# Altium PCB Lidar_MCU_PCB_3.PcbDoc
Units mil, origin at the board's own origin, x right, y up, seen from the top; angles counter-clockwise.
Board outline 2362.2 x 1673.23 mil, 4 copper layers (Top Layer 1, GND, 3V3, Bottom Layer 1), stack 22.334 mil thick; 41 components, 52 nets, 244 pads, 51 vias.
Unrouted connection lines stored in the file: 4.
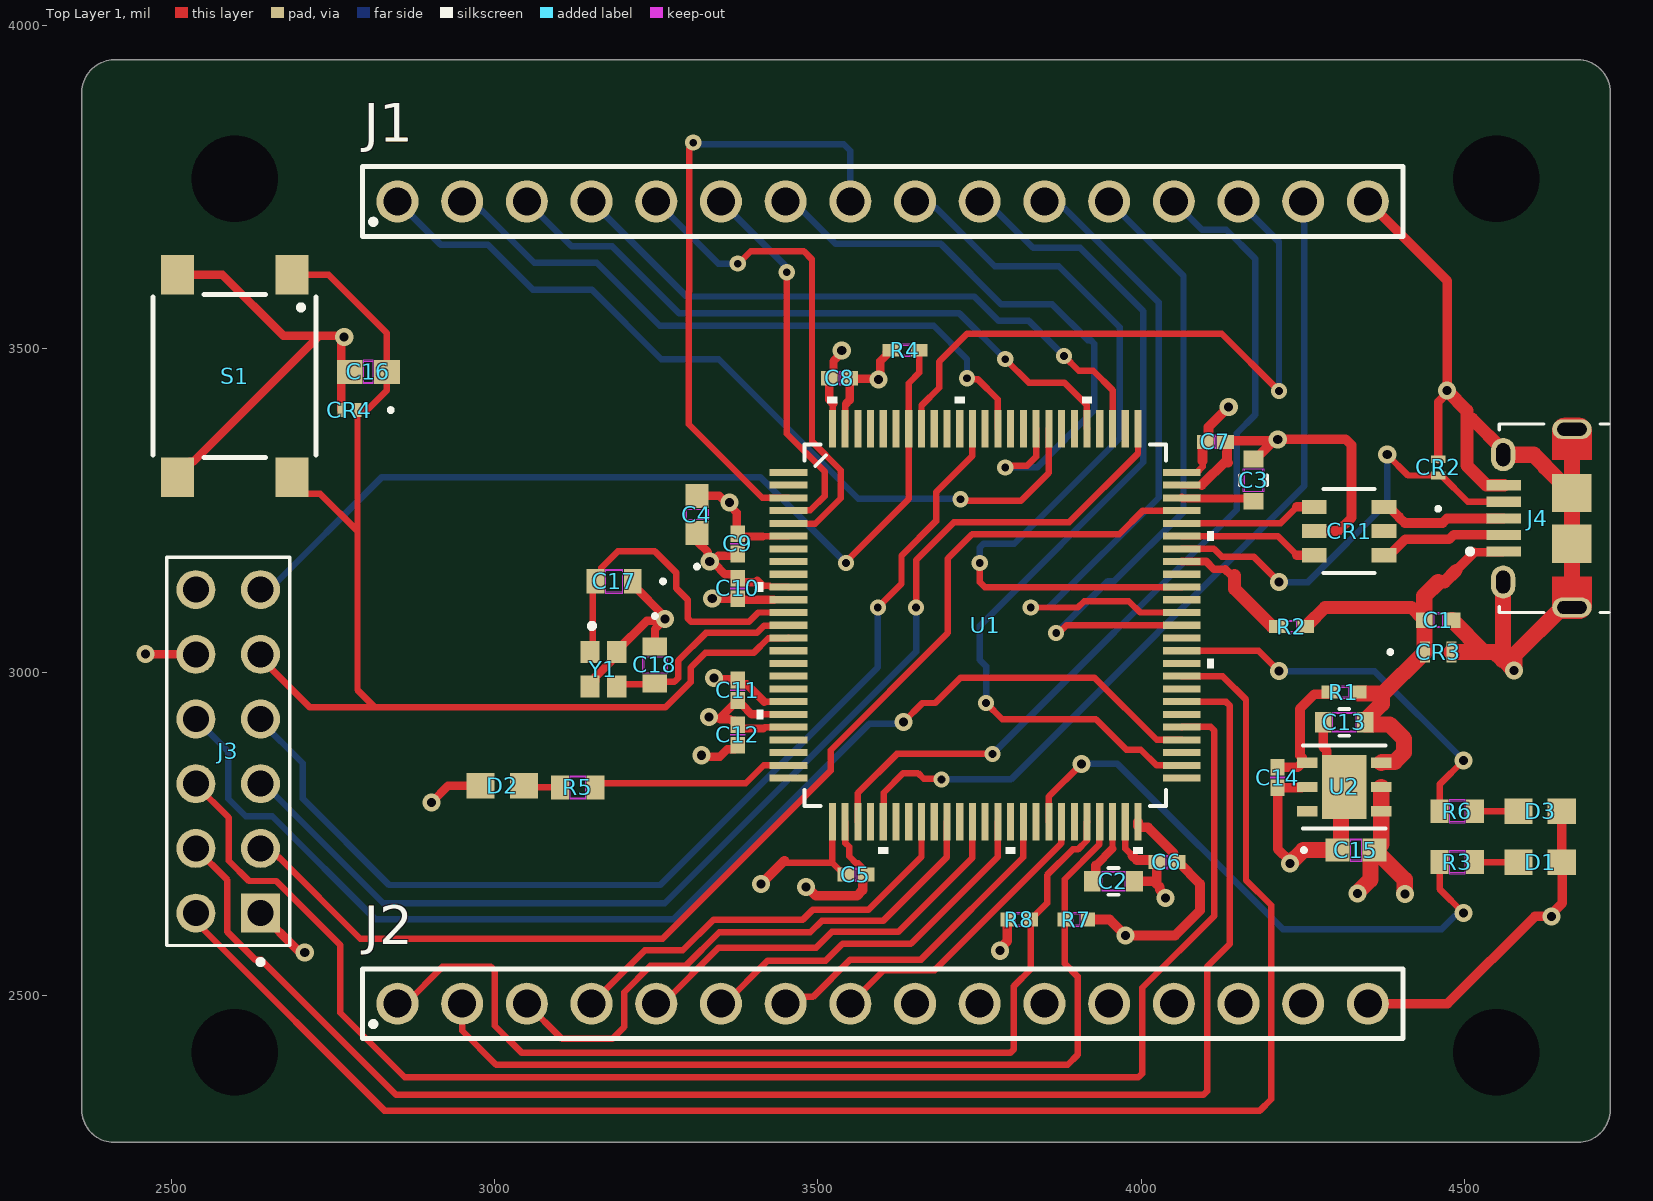
[diagram p0: Top Layer 1 view]
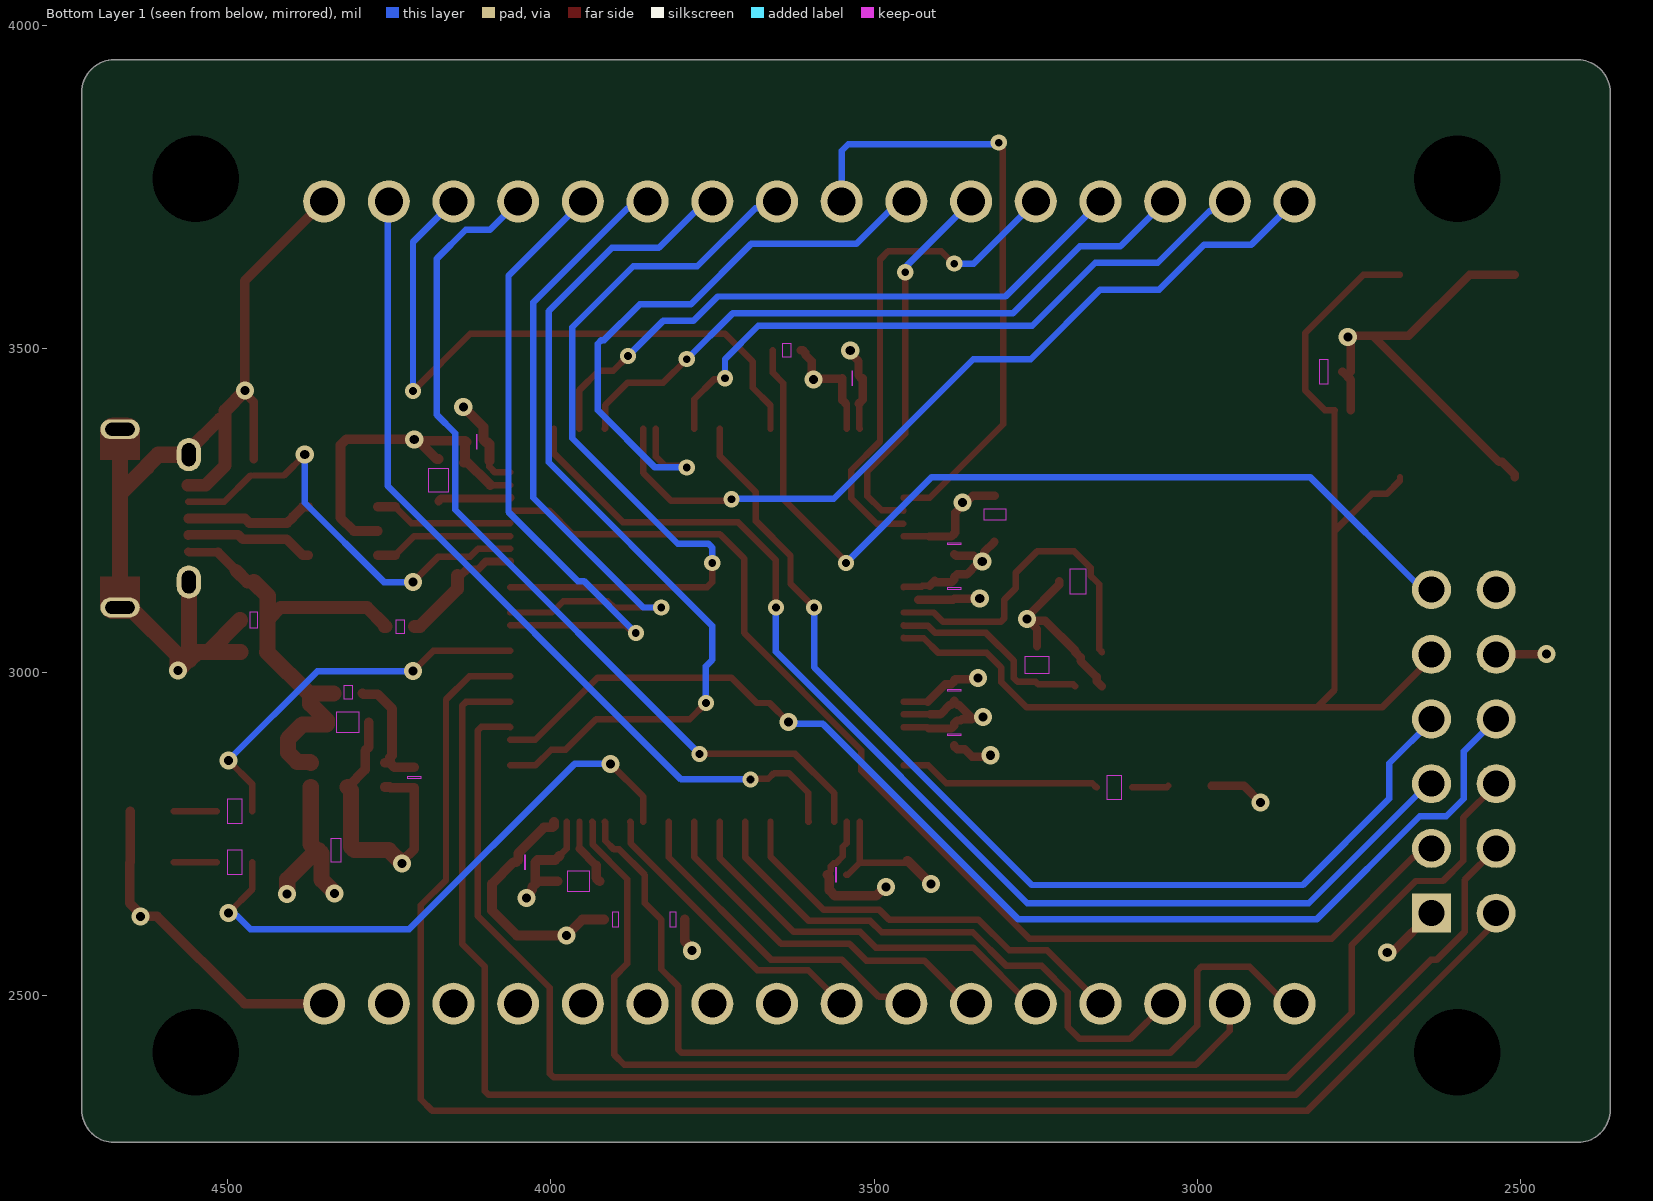
[diagram p1: Bottom Layer 1 view, seen from below]
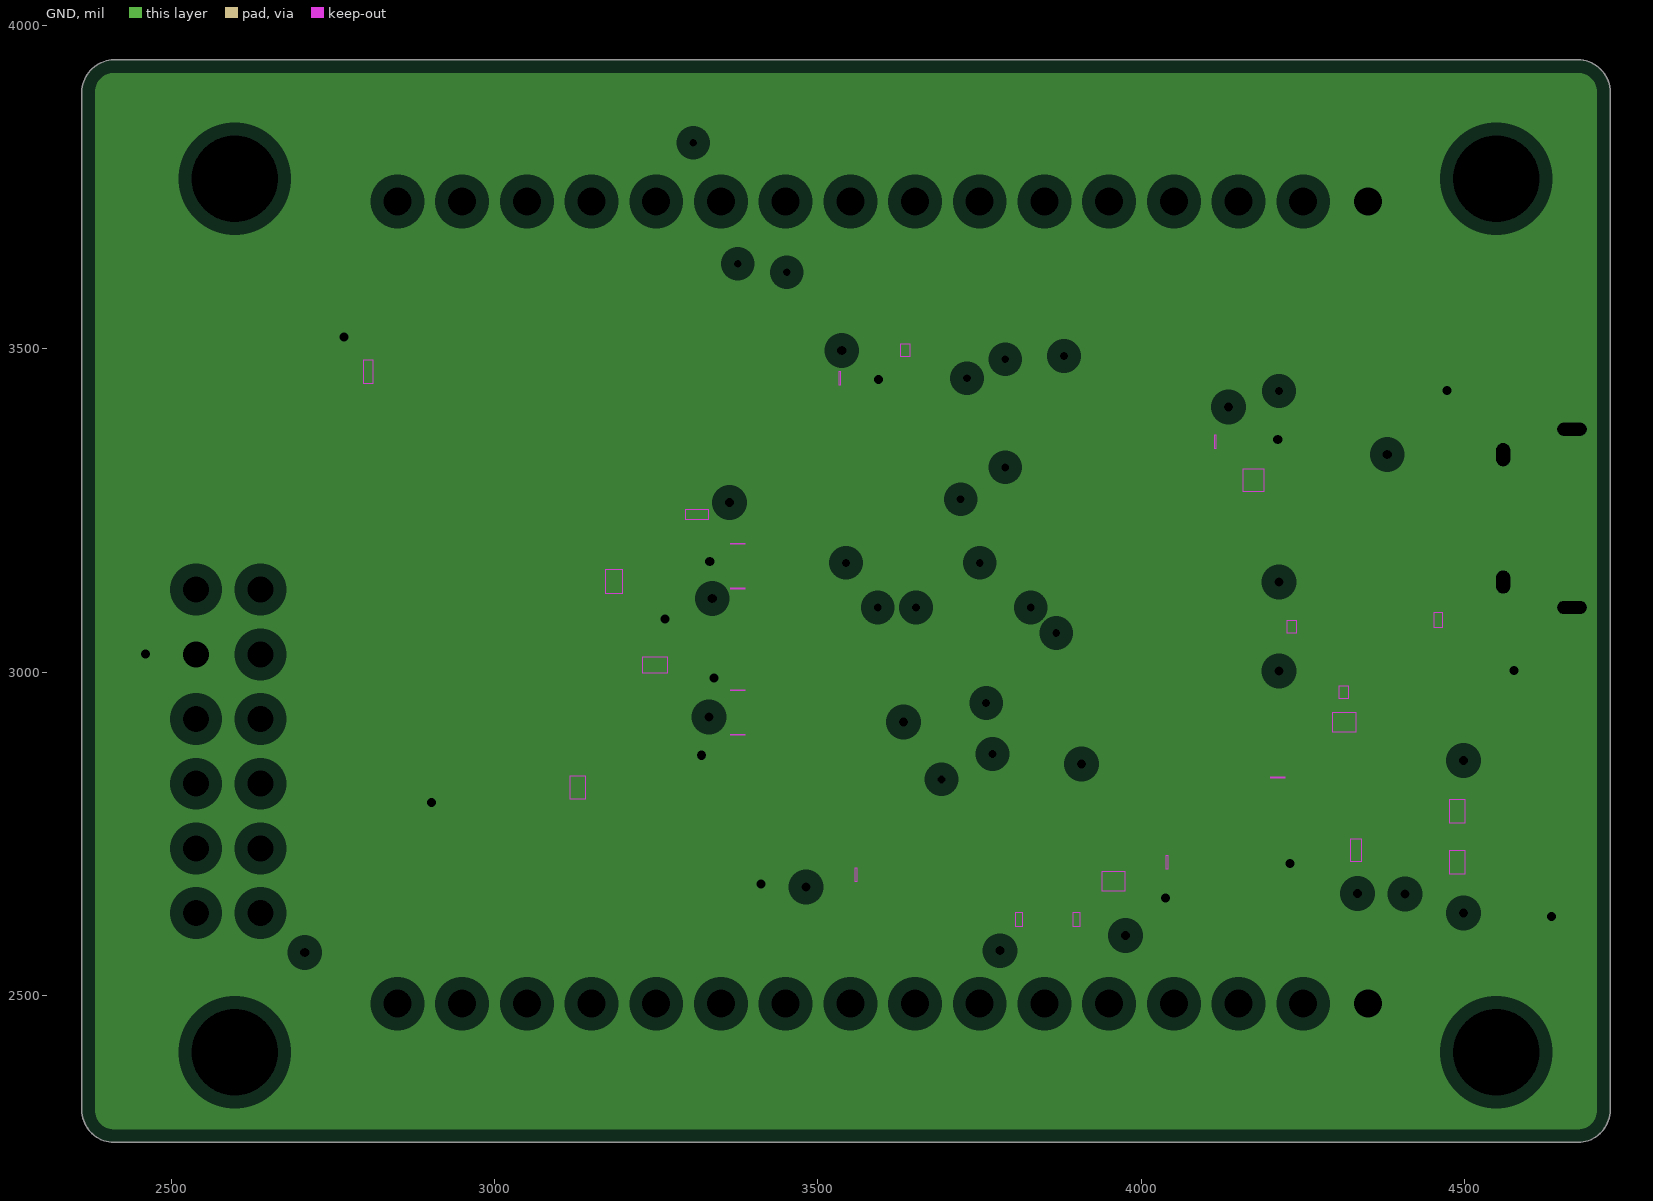
[diagram p2: GND, clearances drawn from the general rule]
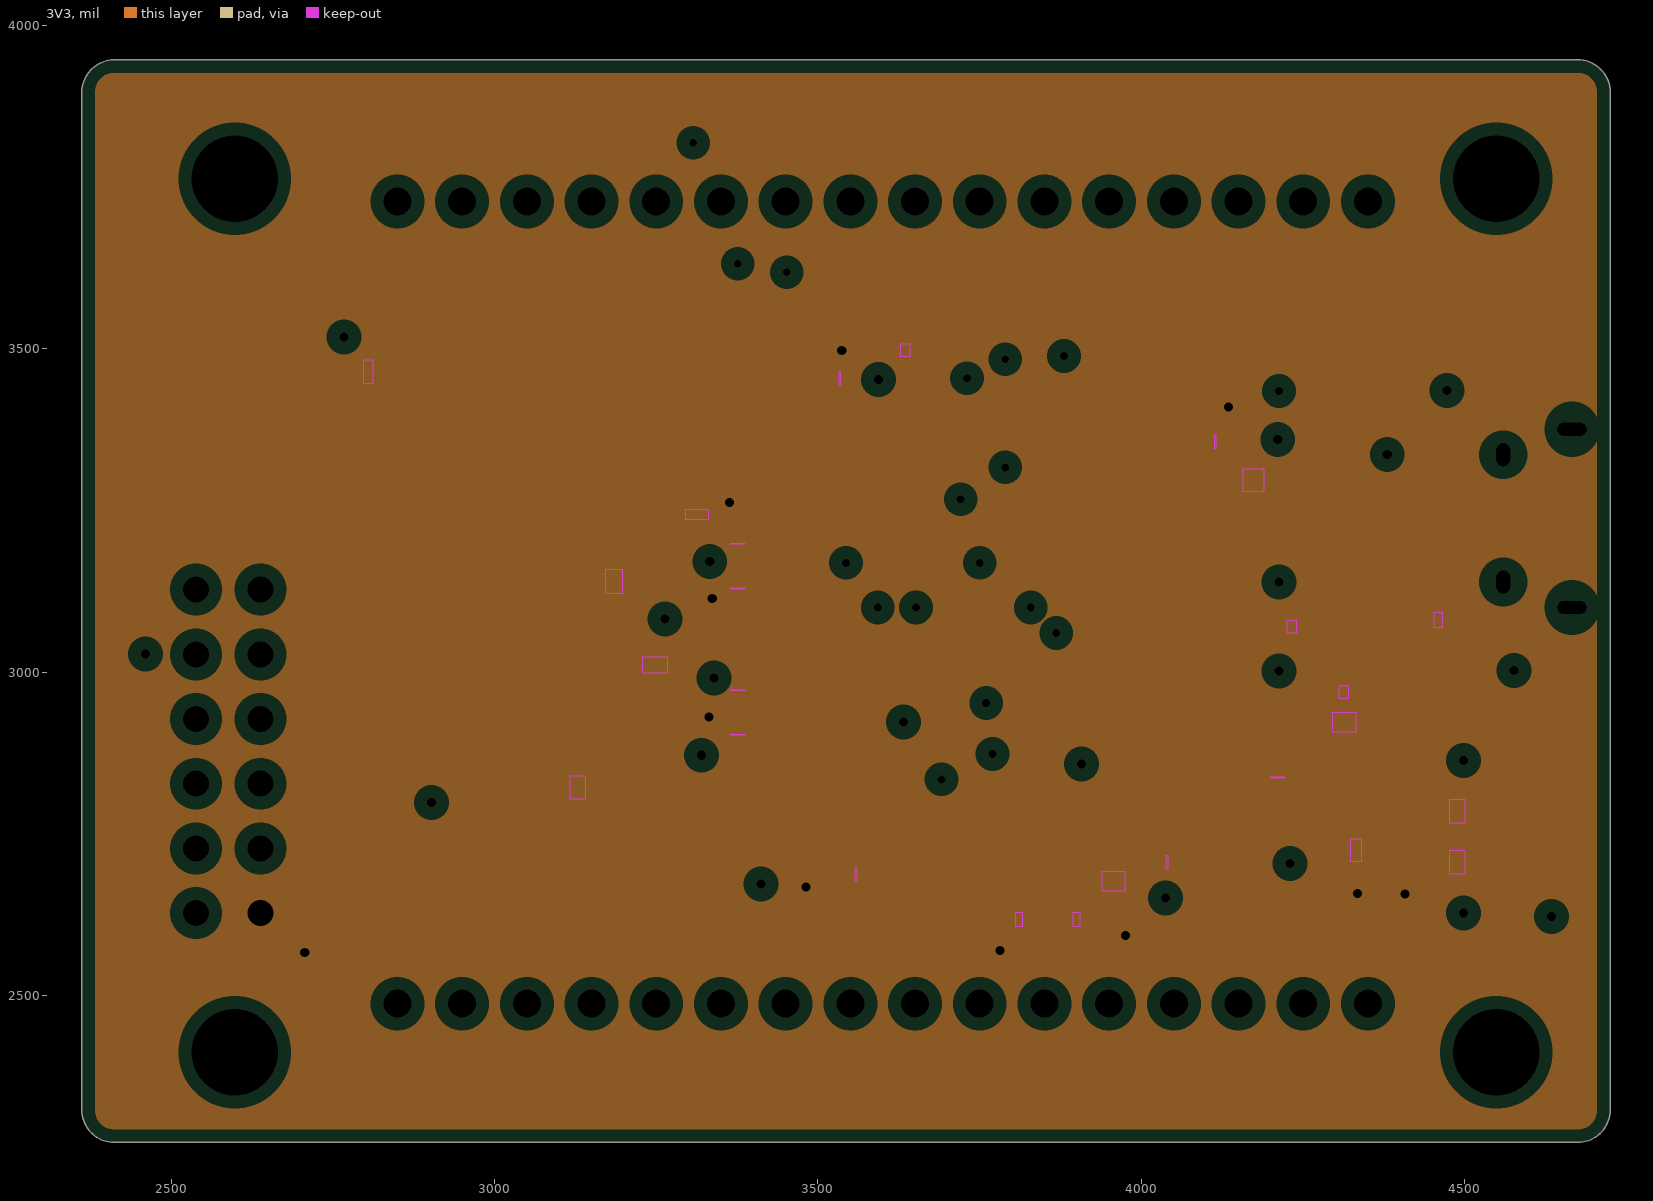
[diagram p3: 3V3, clearances drawn from the general rule]
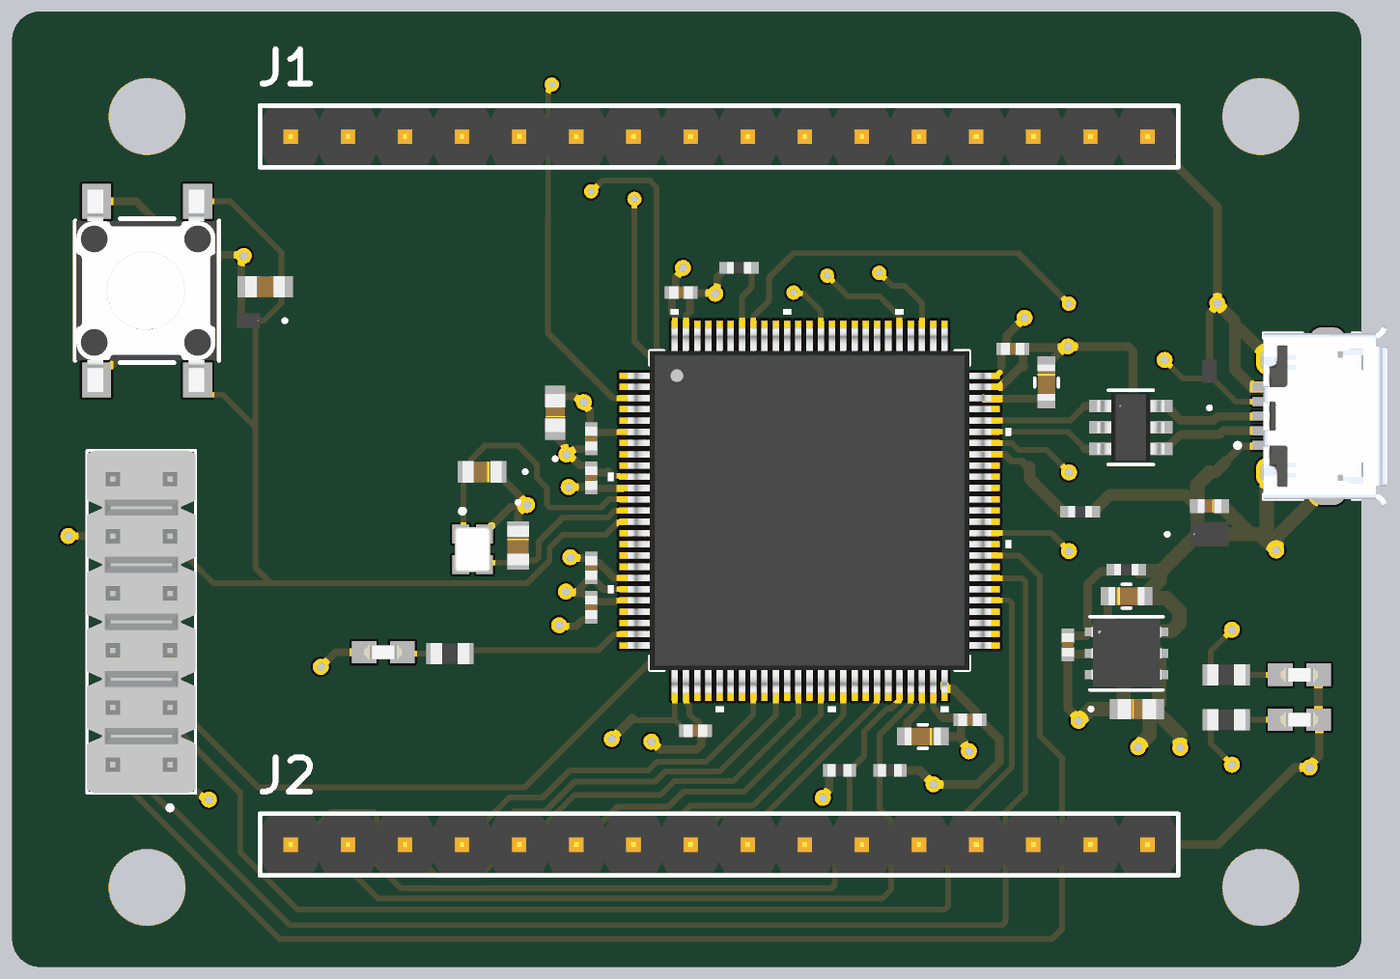
[diagram p4: 3D render of the assembled board from above, using the file's embedded part models]

## Layer stack, top to bottom
Top Solder: solder mask 0.4, Solder Resist, Dk 3.5
Top Layer 1: signal copper 1.378
Dielectric 2: prepreg 2.8, PP-006, Dk 4.1
GND: plane copper 0.689, net GND
Dielectric 1: dielectric 12.6, FR-4, Dk 4.8
3V3: plane copper 0.689, net 3V3
Dielectric 3: prepreg 2.8, PP-006, Dk 4.1
Bottom Layer 1: signal copper 1.378
Bottom Solder: solder mask 0.4, Solder Resist, Dk 3.5

## Board outline
2362.2,2323.62 ccw(c2412.2,2323.62) 2412.2,2273.62 4674.41,2273.62 ccw(c4674.41,2323.62) 4724.41,2323.62 4724.41,3896.85 ccw(c4674.41,3896.85) 4674.41,3946.85 2412.21,3946.85 ccw(c2412.2,3896.85) 2362.2,3896.85

## Design rules (kind name [scope] priority, off if disabled: settings)
Clearance [All] p1: gap=1.5 ignorepadtopadclearanceinfootprint=FALSE except(5.91: Arc-Arc Arc-Track Track-Track; 12: SMDPad-THPad)
DiffPairsRouting [All] p1: maxlimit=15 minlimit=10 mostfreqgap=15 toplayer_minwidth=15 toplayer_maxwidth=15 toplayer_prefwidth=15 bottomlayer_minwidth=15 bottomlayer_maxwidth=15 bottomlayer_prefwidth=15 maxuncoupledlength=500
HoleSize [All] p1: absolutevalues=TRUE maxlimit=150 minlimit=1 maxpercent=80.000 minpercent=20.000
MinimumSolderMaskSliver [All] p1: minsoldermaskwidth=1.5
PlaneClearance [All] p1: clearance=20
PlaneConnect [All] p1: planeconnectstyle=Direct reliefexpansion=20 reliefentries=4 reliefconductorwidth=10 reliefairgap=10
PolygonConnect [All] p1: connectstyle=Relief reliefconductorwidth=10 reliefentries=4 polygonreliefangle="90 Angle" airgapwidth=10
RoutingVias [All] p1: holewidth=14 width=28 viastyle="Through Hole" minholewidth=14 minwidth=25 maxholewidth=28 maxwidth=50
SilkToSolderMaskClearance [IsPad] p1: minsilkscreentomaskgap=7.09 clearancetoexposedcopper=TRUE
SolderMaskExpansion [All] p1: expansion=4 istentingtop=FALSE
SupplyNets "Schematic Supply Nets_2" [InNet('3V3')] p1: voltage=0.000
SupplyNets "Schematic Supply Nets_1" [InNet('GND')] p2: voltage=0.000
SupplyNets "Schematic Supply Nets" [InNet('5V_USB')] p3: voltage=0.000
Width [All] p1: maxlimit=25 minlimit=10 preferedwidth=10
24 further rules are at their usual default settings.

## Classes and differential pairs
net class GPIO_[0..3]: GPIO_0 GPIO_1 GPIO_2 GPIO_3
net class DCMI_[0..11]: DCMI_0 DCMI_1 DCMI_2 DCMI_3 DCMI_4 DCMI_5 DCMI_6 DCMI_7 DCMI_8 DCMI_9 DCMI_10 DCMI_11
component class USB: C1 CR1 CR2 CR3 J4
component class POWER: C13 C14 C15 R1 U2
component class MCU: C2 C3 C4 C5 C6 C7 C8 C9 C10 C11 C12 C16 C17 C18 CR4 D1 D2 D3 R2 R3 R4 R5 R6 R7 R8 S1 U1 Y1
component class Communications: J1 J2 J3
differential pair USB_FS_CN: +USB_FS_CN_P -USB_FS_CN_N
differential pair USB_FS: +USB_FS_P -USB_FS_N

## Components (designator, comment, footprint, x,y, rotation, side; value= is the part's Value field where it differs from the comment)
C1 "CC0402JRNPO9BN101" CAP_CC0402_YAG 4458.66,3080.71 r180 top
C2 "2.2uF" CAP_CL10_SAM 3956.69,2677.17 r180 top
C3 "2.2uF" CAP_CL10_SAM 4173.23,3297.24 r270 top
C4 "4.7uF" LMK107_TAY 3312.99,3244.09 r90 top
C5 "100nF" CAPC10555_55N_KEM 3558.65,2687.4 r0 top
C6 "100nF" CAPC10555_55N_KEM 4039.31,2706.69 r0 top
C7 "100nF" CAPC10555_55N_KEM 4114.17,3356.3 r180 top
C8 "100nF" CAPC10555_55N_KEM 3533.46,3454.72 r180 top
C9 "100nF" CAPC10555_55N_KEM 3375.98,3198.82 r90 top
C10 "100nF" CAPC10555_55N_KEM 3375.98,3129.92 r270 top
C11 "100nF" CAPC10555_55N_KEM 3375.98,2972.44 r270 top
C12 "100nF" CAPC10555_55N_KEM 3375.98,2903.54 r90 top
C13 "4.7uF" CAP_CL10_SAM 4313.43,2922.99 r0 top
C14 "100nF" CAPC10555_55N_KEM 4210.63,2837.6 r90 top
C15 "4.7uF" LMK107_TAY 4331.58,2725.39 r0 top
C16 "100nF" CAPC17595_90N_KEM 2805.12,3464.57 r0 top
C17 "6pF" CAP_06033D104JAT2A 3185.04,3140.75 r180 top
C18 "6pF" CAP_06033D104JAT2A 3248.03,3011.81 r270 top
CR1 "USBLC6-2SC6" SOT23-6L_STM 4320.87,3218.5 r0 top
CR2 "ESDALC6V1-1M2" SOD882_STM 4458.66,3316.93 r90 top
CR3 "ESDA7P60-1U1M" ZDO_1610_STM 4458.66,3031.5 r0 top
CR4 "ESDALC6V1-1M2" SOD882_STM 2775.59,3405.51 r180 top
D1 "LTST-S270KRKT" 0603 4616.14,2706.69 r180 top
D2 "LTST-S270KRKT" 0603 3011.81,2824.8 r0 top
D3 "LTST-S270KRKT" 0603 4616.14,2785.43 r180 top
J1 "6130XX11121_61301611121" 61301611121 3600,3727.99 r0 top
J2 "6130XX11121_61301611121" 61301611121 3600,2487.99 r0 top
J3 "10129381-912001BLF" AMPHENOL_10129381-912001BLF 2588.43,2877.99 r90 top
J4 "10118194-0001LF" AMPHENOL_10118194-0001LF 4665.35,3238.19 r90 top
R1 "10k" RC0402N_YAG 4312.99,2969.49 r0 top
R2 "10k" RC0402N_YAG 4232.28,3070.87 r180 top
R3 "330" STA_RMCF0603_STP 4488.19,2706.69 r180 top
R4 "10k" RC0402N_YAG 3634.84,3498.03 r0 top
R5 "330" STA_RMCF0603_STP 3128.58,2822.2 r0 top
R6 "330" STA_RMCF0603_STP 4488.19,2785.43 r180 top
R7 "4.7k" YAG_R0402_YAG 3899.32,2618.11 r180 top
R8 "4.7k" YAG_R0402_YAG 3810.74,2618.11 r0 top
S1 "430182043816" 430182043816 2598.43,3457.99 r270 top
U1 "STM32H7A3VIT6" LQFP100 3758.43,3072.99 r0 top
U2 "ST1L05CPU33R" DFN6_3X3_STM 4313.43,2822.99 r0 top
Y1 "ECS-250-6-37-JTN-TR" XTAL_ECS-250-6-37-JTN-TR 3168.31,3004.92 r270 top

## Footprints (in the part's own frame and the unit in brackets; to place one, negate y for a bottom-side part, rotate by r counter-clockwise, add the part's x,y. Pads: shape width x height; smd on the part's side, far side on the other; paste and mask are expansions set on the pad)
0603 [mm]
  rect 1.1x1 smd: 1(-0.85,0) 2(0.85,0)
  body extent -0.82,-0.3 0.82,0.3, height 1.15
61301611121 [mm]
  round 1.65 hole 1.1: 1(-19.05,0) 2(-16.51,0) 3(-13.97,0) 4(-11.43,0) 5(-8.89,0) 6(-6.35,0) 7(-3.81,0) 8(-1.27,0) 9(1.27,0) 10(3.81,0) 11(6.35,0) 12(8.89,0) 13(11.43,0) 14(13.97,0) 15(16.51,0) 16(19.05,0)
  silkscreen extent -20.42,-1.37 20.42,1.37, body extent -20.32,-1.27 20.32,1.27, height 8.69
430182043816 [mm]
  rect 1.55x1.3 smd: 1(-3.975,2.25) 2(-3.975,-2.25) 3(3.975,2.25) 4(3.975,-2.25)
  silkscreen extent -3.2,-3.2 3.2,3.2, body extent -4.5,-3.15 4.5,3.05, height 4.3
AMPHENOL_10118194-0001LF [mm]
  rect 0.4x1.35 smd: 1(-1.3,2.675) 2(-0.65,2.675) 3(0,2.675) 4(0.65,2.675) 5(1.3,2.675)
  oval 0.775x1.55 hole 0.5 slot 1.15 at 90 deg mask+0: SH1(-3.5,0) SH4(3.5,0)
  rect 1.5x1.55 smd: SH2(1,0) SH3(-1,0)
  oval 1.3x0.95 hole 0.55 slot 0.9 at 0 deg: SH5(-2.5,2.7) SH6(2.5,2.7)
  Top Layer 1 region: 3.471,0.774 3.497,0.772 3.523,0.769 3.549,0.764 3.574,0.758 3.6,0.751 3.624,0.742 3.648,0.732 3.672,0.721 3.695,0.708 3.717,0.694 3.739,0.68 3.76,0.664 3.78,0.647 3.799,0.629 3.817,0.61 3.834,0.59 3.85,0.569 3.864,0.547 3.878,0.525 3.891,0.502 3.902,0.478 3.912,0.454 3.921,0.43 3.928,0.404 3.934,0.379 3.939,0.353 3.942,0.327 3.944,0.301 3.945,0.275 3.945,-0.275 3.944,-0.301 3.942,-0.327 3.939,-0.353 3.934,-0.379 3.928,-0.404 3.921,-0.43 3.912,-0.454 3.902,-0.478 3.891,-0.502 3.878,-0.525 3.864,-0.547 3.85,-0.569 3.834,-0.59 3.817,-0.61 3.799,-0.629 3.78,-0.647 3.76,-0.664 3.739,-0.68 3.717,-0.694 3.695,-0.708 3.672,-0.721 3.648,-0.732 3.624,-0.742 3.6,-0.751 3.574,-0.758 3.549,-0.764 3.523,-0.769 3.497,-0.772 3.471,-0.774 3.445,-0.775 2.3,-0.775 2.3,0.775 3.445,0.775
  Top Layer 1 region: -2.3,-0.775 -3.445,-0.775 -3.471,-0.774 -3.497,-0.772 -3.523,-0.769 -3.549,-0.764 -3.574,-0.758 -3.6,-0.751 -3.624,-0.742 -3.648,-0.732 -3.672,-0.721 -3.695,-0.708 -3.717,-0.694 -3.739,-0.68 -3.76,-0.664 -3.78,-0.647 -3.799,-0.629 -3.817,-0.61 -3.834,-0.59 -3.85,-0.569 -3.864,-0.547 -3.878,-0.525 -3.891,-0.502 -3.902,-0.478 -3.912,-0.454 -3.921,-0.43 -3.928,-0.404 -3.934,-0.379 -3.939,-0.353 -3.942,-0.327 -3.944,-0.301 -3.945,-0.275 -3.945,0.275 -3.944,0.301 -3.942,0.327 -3.939,0.353 -3.934,0.379 -3.928,0.404 -3.921,0.43 -3.912,0.454 -3.902,0.478 -3.891,0.502 -3.878,0.525 -3.864,0.547 -3.85,0.569 -3.834,0.59 -3.817,0.61 -3.799,0.629 -3.78,0.647 -3.76,0.664 -3.739,0.68 -3.717,0.694 -3.695,0.708 -3.672,0.721 -3.648,0.732 -3.624,0.742 -3.6,0.751 -3.574,0.758 -3.549,0.764 -3.523,0.769 -3.497,0.772 -3.471,0.774 -3.445,0.775 -2.3,0.775
  silkscreen extent -3.7,-1.45 3.7,4.1, body extent -4.02,-2.68 4.02,2.85, height 2.67
AMPHENOL_10129381-912001BLF [mm]
  rect 1.53x1.53 / inner round 1.53 / far side rect 1.53x1.53 hole 1.02: 01(-6.35,-1.27)
  round 1.53 hole 1.02: 02(-6.35,1.27) 03(-3.81,-1.27) 04(-3.81,1.27) 05(-1.27,-1.27) 06(-1.27,1.27) 07(1.27,-1.27) 08(1.27,1.27) 09(3.81,-1.27) 10(3.81,1.27) 11(6.35,-1.27) 12(6.35,1.27)
  silkscreen extent -8.37,-2.42 7.62,2.41, body extent -7.62,-2.42 7.62,2.41, height 8.69
CAP_06033D104JAT2A [mm]
  rect 0.703x0.96 smd paste+0 mask+0: 1(-0.727,0) 2(0.727,0)
  Top Layer 1 keep-out region: -0.324,-0.429 -0.324,0.429 0.324,0.429 0.324,-0.429
  Keep-Out Layer region: -0.324,-0.48 -0.324,0.48 0.324,0.48 0.324,-0.48
  silkscreen extent -1.99,-0.08 -1.84,0.08, body extent -0.87,-0.48 0.87,0.48, height 0.9
CAP_CC0402_YAG [mil]
  rect 26x24 smd paste+0 mask+0: 1(-21.5,0) 2(21.5,0)
  Top Layer 1 keep-out region: -6.5,-10 -6.5,10 6.5,10 6.5,-10
  Keep-Out Layer region: -6.5,-12 -6.5,12 6.5,12 6.5,-12
  body extent -21,-12 21,12, height 22
CAP_CL10_SAM [mm]
  rect 0.656x0.8 smd paste+0 mask+0: 1(-0.828,0) 2(0.828,0)
  Top Layer 1 keep-out region: -0.449,-0.349 -0.449,0.349 0.449,0.349 0.449,-0.349
  Keep-Out Layer region: -0.449,-0.4 -0.449,0.4 0.449,0.4 0.449,-0.4
  silkscreen extent -0.19,-0.53 0.19,0.53, body extent -0.8,-0.4 0.8,0.4, height 0.9
CAPC10555_55N_KEM [mm]
  rect 0.653x0.55 smd paste+0 mask+0: 1(-0.402,0) 2(0.402,0)
  Top Layer 1 keep-out region: -0.024,-0.224 -0.024,0.224 0.024,0.224 0.024,-0.224
  Keep-Out Layer region: -0.024,-0.275 -0.024,0.275 0.024,0.275 0.024,-0.275
  body extent -0.53,-0.28 0.53,0.28, height 0.55
CAPC17595_90N_KEM [mm]
  rect 1.006x0.95 smd paste+0 mask+0: 1(-0.728,0) 2(0.728,0)
  Top Layer 1 keep-out region: -0.174,-0.424 -0.174,0.424 0.174,0.424 0.174,-0.424
  Keep-Out Layer region: -0.174,-0.475 -0.174,0.475 0.174,0.475 0.174,-0.475
  body extent -0.87,-0.48 0.87,0.48, height 0.9
DFN6_3X3_STM [mm]
  rect 0.8x0.4 smd paste+0 mask+0: 1(-1.45,0.95) 2(-1.45,0) 3(-1.45,-0.95) 4(1.45,-0.95) 5(1.45,0) 6(1.45,0.95)
  rect 1.75x2.5 smd paste+0 mask+0: 7(0,0)
  silkscreen extent -1.63,-1.63 1.63,1.63, body extent -1.55,-1.5 1.55,1.5, height 0.8
LMK107_TAY [mm]
  rect 0.956x0.9 smd paste+0 mask+0: 1(-0.728,0) 2(0.728,0)
  Top Layer 1 keep-out region: -0.199,-0.399 -0.199,0.399 0.199,0.399 0.199,-0.399
  Keep-Out Layer region: -0.199,-0.45 -0.199,0.45 0.199,0.45 0.199,-0.45
  silkscreen extent -2.12,-0.08 -1.97,0.08, body extent -0.85,-0.45 0.85,0.45, height 0.9
LQFP100 [mil]
  rect 58x11 smd paste-29 mask+5: 1(-304,236.22) 2(-304,216.54) 3(-304,196.85) 4(-304,177.17) 5(-304,157.48) 6(-304,137.8) 7(-304,118.11) 8(-304,98.43) 9(-304,78.74) 10(-304,59.06) 11(-304,39.37) 12(-304,19.69) 13(-304,0) 14(-304,-19.68) 15(-304,-39.37) 16(-304,-59.06) 17(-304,-78.74) 18(-304,-98.43) 19(-304,-118.11) 20(-304,-137.8) 21(-304,-157.48) 22(-304,-177.17) 23(-304,-196.85) 24(-304,-216.54) 25(-304,-236.22) 51(304,-236.22) 52(304,-216.54) 53(304,-196.85) 54(304,-177.17) 55(304,-157.48) 56(304,-137.8) 57(304,-118.11) 58(304,-98.43) 59(304,-78.74) 60(304,-59.06) 61(304,-39.37) 62(304,-19.68) 63(304,0) 64(304,19.69) 65(304,39.37) 66(304,59.06) 67(304,78.74) 68(304,98.43) 69(304,118.11) 70(304,137.8) 71(304,157.48) 72(304,177.17) 73(304,196.85) 74(304,216.54) 75(304,236.22)
  rect 11x58 smd paste-29 mask+5: 26(-236.22,-304) 27(-216.54,-304) 28(-196.85,-304) 29(-177.17,-304) 30(-157.48,-304) 31(-137.8,-304) 32(-118.11,-304) 33(-98.43,-304) 34(-78.74,-304) 35(-59.06,-304) 36(-39.37,-304) 37(-19.68,-304) 38(0,-304) 39(19.69,-304) 40(39.37,-304) 41(59.06,-304) 42(78.74,-304) 43(98.43,-304) 44(118.11,-304) 45(137.8,-304) 46(157.48,-304) 47(177.17,-304) 48(196.85,-304) 49(216.54,-304) 50(236.22,-304) 76(236.22,304) 77(216.54,304) 78(196.85,304) 79(177.17,304) 80(157.48,304) 81(137.8,304) 82(118.11,304) 83(98.43,304) 84(78.74,304) 85(59.06,304) 86(39.37,304) 87(19.69,304) 88(0,304) 89(-19.68,304) 90(-39.37,304) 91(-59.06,304) 92(-78.74,304) 93(-98.43,304) 94(-118.11,304) 95(-137.8,304) 96(-157.48,304) 97(-177.17,304) 98(-196.85,304) 99(-216.54,304) 100(-236.22,304)
  silkscreen extent -353,-353 353,353, body extent -319,-319 319,319, height 63
RC0402N_YAG [mil]
  rect 25.78x20 smd paste+0 mask+0: 1(-21.89,0) 2(21.89,0)
  Top Layer 1 keep-out region: -7,-8 -7,8 7,8 7,-8
  Keep-Out Layer region: -7,-10 -7,10 7,10 7,-10
  body extent -21,-10 21,10, height 28
SOD882_STM [mil]
  rect 12x22 smd paste+0 mask-1: 1(-12.5,0) 2(12.5,0)
  silkscreen extent -67,-3 -61,3, body extent -21,-13 21,13, height 20
SOT23-6L_STM [mil]
  rect 38.5x22 smd paste+0 mask+0: 1(-53.75,37.4) 2(-53.75,0) 3(-53.75,-37.4) 4(53.75,-37.4) 5(53.75,0) 6(53.75,37.4)
  silkscreen extent -39,-65 40,65, body extent -59,-60 59,60, height 57
STA_RMCF0603_STP [mil]
  rect 28x37 smd paste+0 mask+0: 1(-27.5,0) 2(27.5,0)
  Top Layer 1 keep-out region: -11.5,-16.5 -11.5,16.5 11.5,16.5 11.5,-16.5
  Keep-Out Layer region: -11.5,-18.5 -11.5,18.5 11.5,18.5 11.5,-18.5
  body extent -34,-19 34,19, height 22
XTAL_ECS-250-6-37-JTN-TR [mm]
  rect 0.85x0.75 smd: 1(-0.675,-0.525) 2(0.675,-0.525) 3(0.675,0.525) 4(-0.675,0.525)
  silkscreen extent -1.8,-0.55 -1.6,-0.35, body extent -1,-0.8 1,0.8, height 0.55
YAG_R0402_YAG [mil]
  rect 22x22 smd paste+0 mask+0: 1(-18,0) 2(18,0)
  Top Layer 1 keep-out region: -5,-9 -5,9 5,9 5,-9
  Keep-Out Layer region: -5,-11 -5,11 5,11 5,-11
  body extent -21,-11 21,11, height 16
ZDO_1610_STM [mil]
  rect 16x33 smd paste+0 mask+0: 1(-20.5,0) 2(20.5,0)
  silkscreen extent -77,-3 -71,3, body extent -34,-21 34,21, height 24

## Part data
C1: "CAPACITOR; SMT (0402); CERAMIC CHIP; 100PF; 50V; TOL=5%; TG=-55 DEGC TO +125 DEGC; TC=C0G", Manufacturer_Name=Yageo, Copyright="Copyright (C) 2025 Ultra Librarian. All rights reserved.", Manufacturer_Part_Number=CC0402JRNPO9BN101
C2 C3: library part CL10B225KP8NNNC, "CL10B225KP8NNNC", Manufacturer_Name=Samsung, Copyright="Copyright (C) 2025 Ultra Librarian. All rights reserved.", Manufacturer_Part_Number=CL10B225KP8NNNC
C4: library part LMK107BJ475MAHT, "LMK107BJ475MAHT", Manufacturer_Name="TAIYO YUDEN", Copyright="Copyright (C) 2025 Ultra Librarian. All rights reserved.", Manufacturer_Part_Number=LMK107BJ475MAHT
C5 C6 C7 C8 C9 C10 C11 C12 C14: library part C0402C104K4RACTU, "SMD Comm X7R, Ceramic, 0.1 uF, 10%, 16 VDC, X7R, SMD, MLCC, Temperature Stable, Class II, 0402", Manufacturer_Name=Kemet, Copyright="Copyright (C) 2025 Ultra Librarian. All rights reserved.", Manufacturer_Part_Number=C0402C104K4RACTU
C13: library part CL10A475MO8NNNC, "No Description Available", Manufacturer_Name=Samsung, Copyright="Copyright (C) 2025 Ultra Librarian. All rights reserved.", Manufacturer_Part_Number=CL10A475MO8NNNC
C15: library part LMK107BJ475MAHT, "No Description Available", Manufacturer_Name="TAIYO YUDEN", Copyright="Copyright (C) 2025 Ultra Librarian. All rights reserved.", Manufacturer_Part_Number=LMK107BJ475MAHT
C16: library part C0603C104K9PACTU, "SMD Comm X5R, Ceramic, 0.1 uF, 10%, 6.3 VDC, X5R, SMD, MLCC, Temperature Stable, Class II, 0603", Manufacturer_Name=Kemet, Copyright="Copyright (C) 2025 Ultra Librarian. All rights reserved.", Manufacturer_Part_Number=C0603C104K9PACTU
C17 C18: library part 06035A6R0JAT2A, "No Description Available", Manufacturer_Name="KYOCERA AVX", Copyright="Copyright (C) 2025 Ultra Librarian. All rights reserved.", Manufacturer_Part_Number=06035A6R0JAT2A
CR1: "ESD Protection for USB 2.0 High Speed", Manufacturer_Name=STMicroelectronics, Copyright="Copyright (C) 2025 Ultra Librarian. All rights reserved.", Manufacturer_Part_Number=USBLC6-2SC6, RefDes=RefDes, Type=Type
CR2 CR4: "Single line low capacitance Transil&#8482;, transient surge voltage suppressor (TVS) for ESD protection", Manufacturer_Name=STMicroelectronics, Copyright="Copyright (C) 2025 Ultra Librarian. All rights reserved.", Manufacturer_Part_Number=ESDALC6V1-1M2, RefDes=RefDes, Type=Type
CR3: "60 A - 8/20 us, 5 V TVS in QFN-2L", Manufacturer_Name=STMicroelectronics, Copyright="Copyright (C) 2025 Ultra Librarian. All rights reserved.", Manufacturer_Part_Number=ESDA7P60-1U1M, RefDes=RefDes, Type=Type
D1 D2 D3: "http://octopart.com/ltst-c190tbkt-lite-on-550003", Package=None, Availability=Unavailable, MF="{'manufacturer': u'Lite-On Inc.'}", MP=LTST-S270KRKT, Price=None
J1 J2: Package=None, Availability=Unavailable, MF="{'manufacturer': u'Wurth Electronics'}", MP=61301611121, Price=None
J3: "EconoStikâ„¢, Board to Board connector, Unshrouded Vertical Header, Through Hole, Double Row, 12 Positions, 2.54 mm (0.100in) Pitch.", Package=None, Check_prices=https://www.snapeda.com/parts/10129381-912001BLF/Amphenol+FCI/view-part/?ref=eda, Digi-Key_Part_Number=10129381-912001BLF-ND, MF="Amphenol ICC (FCI)", MP=10129381-912001BLF, Purchase-URL=https://pricing.snapeda.com/search/part/10129381-912001BLF/?ref=eda, SnapEDA_Link=https://www.snapeda.com/parts/10129381-912001BLF/Amphenol+FCI/view-part/?ref=snap
J4: "Micro USB, Input Output Connectors, B TYPE RECEPTACLE with flange", Package=None, Check_prices=https://www.snapeda.com/parts/10118194-0001LF/Amphenol+FCI/view-part/?ref=eda, MF="Amphenol ICC", MP=10118194-0001LF, SnapEDA_Link=https://www.snapeda.com/parts/10118194-0001LF/Amphenol+FCI/view-part/?ref=snap
R1 R2 R4: library part RC0402FR-0710KL, "RES; SMT (0402); 10K; 1%; +/-100PPM/DEGC; 0.0630W", Manufacturer_Name=Yageo, Copyright="Copyright (C) 2025 Ultra Librarian. All rights reserved.", Manufacturer_Part_Number=RC0402FR-0710KL
R3 R5 R6: library part RMCF0603FT330R, "No Description Available", Manufacturer_Name="Stackpole International", Copyright="Copyright (C) 2025 Ultra Librarian. All rights reserved.", Manufacturer_Part_Number=RMCF0603FT330R
R7 R8: library part RC0402FR-074K7L, "Description", Manufacturer_Name=Yageo, Copyright="Copyright (C) 2025 Ultra Librarian. All rights reserved.", Manufacturer_Part_Number=RC0402FR-074K7L
S1: "6*6mm vertical type, SMT, height 4.3mm, black actuator, 160gf, T&R", Package=None, Check_prices=https://www.snapeda.com/parts/430182043816/Wurth+Electronics/view-part/?ref=eda, MF="Wurth Electronics", MP=430182043816, SnapEDA_Link=https://www.snapeda.com/parts/430182043816/Wurth+Electronics/view-part/?ref=snap
U1: "High-performance and DSP with DP-FPU, Arm Cortex-M7  MCU with 2MBytes of Flash memory, 1376 KB SRAM, 280 MHz CPU, L1 cache, graphic accelerations, external memory interfaces, SMPS and large set of peripherals", Manufacturer_Name=STMicroelectronics, Copyright="Copyright (C) 2025 Ultra Librarian. All rights reserved.", Manufacturer_Part_Number=STM32H7A3VIT6, RefDes=RefDes, Type=Type
U2: "Very low quiescent BiCMOS voltage regulator", Manufacturer_Name=STMicroelectronics, Copyright="Copyright (C) 2025 Ultra Librarian. All rights reserved.", Manufacturer_Part_Number=ST1L05CPU33R, RefDes=RefDes, Type=Type
Y1: "SMD Crystal 2.0 x 1.6 x 0.45 mm ceramic package", Package=None, Availability=Unavailable, ComponentLink1Description="New link", MP=ECS-250-6-37-JTN-TR, Price=None

## Free pads (board coordinates)
  round 60 hole 133.86: 2(2598.43,2412.99) 2(2598.43,3762.99) 2(4548.43,2412.99) 2(4548.43,3762.99)

## Via types
v1: diameter 28, hole 14, Top Layer 1 to Bottom Layer 1, 33 vias
v2: diameter 25, hole 12, Top Layer 1 to Bottom Layer 1, 18 vias

## Nets (pads, with @x,y where several pads share a name; then routed paths per layer and width w, separated by ;. In a path a pad name is that pad's centre, name@x,y a point inside that pad or via, vN(x,y) a via of type N, cw(c..) or ccw(c..) an arc to the next point about the centre after c; other vN are vias at no path point)
3V3: C4.2 C5.2 C6.2 C7.2 C8.2 C9.2 C10.2 C11.2 C12.2 C15.2 J3.01 R7.1 R8.1 U1.6 U1.11 U1.20 U1.21 U1.27 U1.50 U1.75 U1.100 U2.4 U2.5 | length 1843
  Top Layer 1 w10: 3413.13,2935.29 3413.23,2935.2 U1.20 ; 3414.78,3210.07 3415.29,3210.58 3454.22,3210.58 U1.6 ; 3415.35,2913.39 3417.48,2915.51 U1.21 ; U1.100 3522.71,3377.49 3522.71,3414.44 3523.62,3415.35 ; U1.27 3542.39,2768.49 3542.39,2736.2 3548.14,2730.45 3548.14,2715.7 3559.12,2704.72 3562.29,2704.72 3566.6,2700.42 3566.6,2693.22 3572.43,2687.4 C5.2 ; U1.75 4085.93,3309.21 4094.49,3317.77 4094.49,3326.77
  Top Layer 1 w13: J3.01 2696.62,2569.8 2703.82,2569.8 v1(2706.69,2566.93) ; C4.2@3313.28,3273.04 3347.48,3273.04 3354.86,3265.67 3360.32,3265.67 v1@3362.9,3263.09 ; v1(3331.69,2931.1) 3333.99,2928.8 3348.16,2928.8 3369.63,2950.27 3371.66,2950.27 C11.2@3375.98,2954.6 ; v1@3336.65,3114.14 C10.2 ; 3349.17,2927.79 3364.04,2927.79 3366.11,2925.71 3371.66,2925.71 3375.98,2921.39 C12.2 ; v1(3363.19,3262.8) 3366.06,3259.93 3366.06,3255.51 3374.29,3247.28 3374.29,3216.32 C9.2 3375.99,3214.4 3380.31,3210.07 3414.78,3210.07 ; C12.2@3375.98,2917.71 3380.31,2913.39 3415.35,2913.39 ; C10.2 3377.97,3112.12 U1.11@3431.93,3112.12 ; 3413.13,2935.29 3397.32,2935.29 3382.34,2950.27 3380.31,2950.27 C11.2@3375.98,2954.6 ; 3523.62,3415.35 3517.65,3421.32 C8.2 3519.68,3454.72 3524.01,3459.05 3524.01,3481.08 3536.7,3493.77 v1(3536.7,3497.83) ; C11.2@3375.98,2954.6 C11.2 C11.2@3375.98,2954.6
  Top Layer 1 w15: v1(3481.3,2668.31) 3482.93,2668.31 3496.59,2654.65 3540.63,2654.65 3560.31,2654.66 3569.1,2663.45 3569.1,2684.07 C5.2@3572.43,2687.4 ; v1(3781.5,2569.88) 3781.5,2573.4 3792.74,2584.64 R8.1 ; R7.1 3950.79,2618.11 v1(3975.39,2593.5) 4052.17,2593.5 4090.55,2631.89 4090.55,2673.29 4057.15,2706.69 4053.09,2706.69 4049.76,2710.02 4049.76,2720.75 4009.94,2760.56 3996.65,2760.56 3994.65,2762.56 U1.50 ; 4094.49,3326.77 4094.49,3352.97 4097.82,3356.3 C7.2 4100.39,3356.3 4103.72,3359.63 4103.72,3379.31 v1(4134.84,3410.43)
  Top Layer 1 w25: v1(4333.66,2658.46) 4333.66,2659.28 4353.93,2679.54 4353.93,2720.18 4359.14,2725.39 C15.2 ; U2.5 U2.4 4370.51,2734.58 4361.33,2725.39 4406.91,2679.82 4406.91,2658.05 v1(4407.48,2657.48)
  other v1: 3336.61,3114.17
5V_USB: C1.2 C13.2 CR3.1 J4.1 R1.2 R2.1 U2.6 | length 759.5
  Top Layer 1 w13: 4513.98,3185.63 4558.66,3185.63 J4.1
  Top Layer 1 w15: 4486.57,3158.22 4513.98,3185.63
  Top Layer 1 w20: R2.1 4257.06,3070.87 4257.06,3073.76 4283.7,3100.39 4417.48,3100.39 4434.16,3083.71 4434.16,3082.71 4436.16,3080.71 C1.2 C1.2@4437.66,3080.21 ; 4458.66,3139.76 4468.36,3139.76 4486.57,3157.97
  Top Layer 1 w25: R1.2@4335.69,2967.29 4369.86,2967.29 4371.66,2965.49 ; C13.2 4346.02,2920.15 4346.42,2919.74 4383.41,2919.74 4406.02,2897.13 4406.02,2876.42 4391.38,2861.77 4371.89,2861.77 U2.6 ; C13.2@4346.02,2925.83 4371.66,2951.48 4371.66,2965.49 ; C1.2 4437.16,3118.26 4458.66,3139.76 ; CR3.1@4437.66,3032 C1.2@4437.66,3080.21 ; CR3.1 4437.66,3031.5 4371.66,2965.49
BOOT0: J3.11 R4.2 U1.94 | length 1407.7
  Top Layer 1 w10: v2(3543.31,3169.29) 3543.31,3171.21 3640.32,3268.22 U1.94 3640.32,3447.05 3656.73,3463.46 R4.2
  Bottom Layer 1 w10: J3.11 2652.02,3127.99 2826.06,3302.03 3410.57,3302.03 v2(3543.31,3169.29)
CC_RESET: J2.4 U1.33 | length 658
  Top Layer 1 w10: J2.4 3232.56,2570.56 3291.18,2570.56 3338.73,2618.11 3476.8,2618.11 3491.59,2632.9 3577.78,2632.9 3660,2715.12 U1.33
CC_SHUTTER: J2.3 U1.35 | length 874.2
  Top Layer 1 w10: J2.3 3104.4,2433.59 3182,2433.59 3200.49,2452.08 3200.49,2505.88 3240.94,2546.33 3295.36,2546.33 3347.46,2598.43 3488.18,2598.43 3505.66,2615.9 3600.65,2615.9 3699.37,2714.62 U1.35
DCMI_0: J1.12 U1.63 | length 1001.2
  Top Layer 1 w10: v2(3868.11,3061.02) 3872.17,3061.02 3884.14,3072.99 U1.63
  Bottom Layer 1 w10: v2(3868.11,3061.02) 3948.29,3141.2 3958.13,3141.2 4064.96,3248.03 4064.96,3613.03 J1.12
DCMI_1: J1.11 U1.64 | length 1056
  Top Layer 1 w10: v2(3828.74,3100.39) 3901.7,3100.39 3911.54,3110.24 3980.44,3110.24 3998,3092.68 U1.64
  Bottom Layer 1 w10: v2(3828.74,3100.39) 3856.69,3100.39 4026.54,3270.24 4026.54,3571.89 3880.95,3717.48 3860.52,3717.48 J1.11
DCMI_2: J1.10 U1.52 | length 1380.1
  Top Layer 1 w10: v2(3759.84,2952.76) 3784.84,2927.76 3929.66,2927.76 3976.75,2880.68 3999.03,2880.68 4023.25,2856.46 U1.52
  Bottom Layer 1 w10: J1.10 3760.78,3727.99 3832.44,3656.34 3905.05,3656.34 4002.82,3558.57 4002.82,3324.72 3750,3071.89 3750,3019.28 3759.84,3009.43 v2(3759.84,2952.76)
DCMI_3: J1.9 U1.66 | length 1224
  Top Layer 1 w10: v2(3750,3169.29) 3750,3139.76 3757.72,3132.05 U1.66
  Bottom Layer 1 w10: J1.9 3660.52,3717.48 3683.33,3717.48 3773.09,3627.71 3872.29,3627.71 3966.54,3533.46 3966.54,3361.99 3803.36,3198.82 3755.86,3198.82 3750,3192.96 v2(3750,3169.29)
DCMI_4: J1.8 U1.3 | length 966
  Top Layer 1 w10: v2(3307.09,3818.9) 3307.09,3814.84 3300.76,3808.52 3300.76,3589.09 3300.12,3588.45 3300.12,3383.66 3413.94,3269.84 U1.3
  Bottom Layer 1 w10: v2(3307.09,3818.9) 3309.49,3816.5 3539.85,3816.5 3550,3806.35 J1.8
DCMI_5: J1.7 U1.84 | length 943.3
  Top Layer 1 w10: v2(3789.37,3316.93) 3792.24,3319.8 3823.33,3319.8 3837.17,3333.63 U1.84
  Bottom Layer 1 w10: J1.7 3461.67,3727.99 3527.32,3662.34 3689.98,3662.34 3783.45,3568.87 3862.23,3568.87 3917.32,3513.78 3921.31,3513.78 3927.17,3507.92 3927.17,3405.51 3838.58,3316.93 v2(3789.37,3316.93)
DCMI_6: J1.6 U1.4 | length 586.8
  Top Layer 1 w10: v2(3451.79,3618.57) 3451.79,3369.08 3510.25,3310.62 3510.25,3272.67 3488.24,3250.66 3454.93,3250.66 U1.4
  Bottom Layer 1 w10: J1.6 3448.92,3629.07 3448.92,3621.44 v2(3451.79,3618.57)
DCMI_7: J1.5 U1.5 | length 777.5
  Top Layer 1 w10: v2(3375.98,3631.89) 3376.88,3631.89 3395.88,3650.89 3478.27,3650.89 3490.76,3638.4 3490.76,3357.05 3535.12,3312.69 3535.12,3269.35 3495.63,3229.86 3482.47,3229.86 3482.35,3229.97 U1.5@3455.04,3229.97
  Bottom Layer 1 w10: J1.5 3346.1,3631.89 v2(3375.98,3631.89)
DCMI_8: J1.4 U1.78 | length 985.5
  Top Layer 1 w10: v2(3880.27,3489.14) 3903.22,3466.19 3925.54,3466.19 3955.28,3436.46 U1.78
  Bottom Layer 1 w10: J1.4 3296.88,3581.11 3741.72,3581.11 3779.53,3543.31 3826.11,3543.31 v2(3880.27,3489.14)
DCMI_9: J1.3 U1.80 | length 1032.2
  Top Layer 1 w10: v2(3789.37,3484.25) 3825.6,3448.02 3880.64,3448.02 3915.41,3413.26 3915.41,3377.49 U1.80
  Bottom Layer 1 w10: J1.3 3119.17,3658.82 3181.73,3658.82 3285.6,3554.96 3718.67,3554.96 v2(3789.37,3484.25)
DCMI_10: J1.2 U1.87 | length 1017.2
  Top Layer 1 w10: v2(3730.32,3454.72) 3732.19,3452.85 3747.33,3452.85 3777.8,3422.38 3777.8,3377.3 U1.87
  Bottom Layer 1 w10: J1.2 2964.87,3727.99 2980.09,3712.77 2981.93,3712.77 3061.45,3633.24 3158.1,3633.24 3255.5,3535.83 3678.73,3535.83 3730.32,3484.25 v2(3730.32,3454.72)
DCMI_11: J1.1 U1.83 | length 1285.2
  Top Layer 1 w10: v2(3720.47,3267.72) 3723.09,3265.1 3813.62,3265.1 3856.85,3308.33 U1.83
  Bottom Layer 1 w10: J1.1 2916.57,3661.42 2989.41,3661.42 3058.97,3591.85 3150.14,3591.85 3257.74,3484.25 3346.46,3484.25 3562.08,3268.63 3719.56,3268.63 v2(3720.47,3267.72)
DCMI_HSYNC: J1.13 U1.28 | length 1373.8
  Top Layer 1 w10: U1.28 3561.58,2813.54 3622.05,2874.02 v2(3769.69,2874.02)
  Bottom Layer 1 w10: v2(3769.69,2874.02) 4147.09,3251.42 4147.09,3369.53 4175.64,3398.08 4175.64,3639.75 4130.97,3684.42 4093.57,3684.42 J1.13
DCMI_PIXCLK: J1.15 U1.30 | length 1340.9
  Top Layer 1 w10: U1.30 3601.45,2769.49 3601.45,2814.04 3631.89,2844.49 3654.47,2844.49 3663.44,2835.51 3690.08,2835.51 v2(3690.94,2834.65)
  Bottom Layer 1 w10: v2(3690.94,2834.65) 3798.26,2834.65 4251.97,3288.36 4251.97,3726.02 J1.15
DCMI_VSYNC: J1.14 U1.93 | length 1013.6
  Top Layer 1 w10: U1.93 3660,3412.71 3687.28,3439.99 3687.28,3480.59 3730.31,3523.62 4124.02,3523.62 v2(4212.6,3435.04)
  Bottom Layer 1 w10: J1.14 4212.6,3665.39 v2(4212.6,3435.04)
DEBUG_SWCLK: J3.05 U1.76 | length 1842
  Top Layer 1 w10: v2(3651.57,3100.39) 3651.57,3173.41 3710.2,3232.03 3888.14,3232.03 3994.65,3338.53 U1.76
  Bottom Layer 1 w10: J3.05 2643.39,2827.99 2827.92,2643.46 3263.24,2643.46 3651.57,3031.79 v2(3651.57,3100.39)
DEBUG_SWDIO: J3.03 U1.72 | length 1841.6
  Top Layer 1 w10: J3.03 2652.02,2727.99 2666.52,2713.49 2667.73,2713.49 2792.64,2588.58 3259.8,2588.58 3519.56,2848.34 3519.56,2879.8 3700.79,3061.02 3700.79,3176.07 3738.13,3213.41 3965.54,3213.41 4002.29,3250.16 U1.72
DEBUG_SWO: J3.07 U1.89 | length 1663.4
  Top Layer 1 w10: v2(3592.52,3100.39) 3629.11,3136.98 3629.11,3180.58 3682.52,3233.99 3682.52,3278.51 3738.74,3334.73 U1.89
  Bottom Layer 1 w10: J3.07 2638.43,2924.69 2703.41,2859.7 2703.41,2805.11 2837.05,2671.46 3256.3,2671.46 3592.52,3007.68 v2(3592.52,3100.39)
ENABLE_1V8_3V3: J2.6 U1.39 | length 576.1
  Top Layer 1 w10: J2.6 3355.73,2487.99 3422.38,2554.64 3511.83,2554.64 3537.93,2580.75 3643.74,2580.75 3778.11,2715.12 U1.39
ENABLE_5V_10V: J2.5 U1.37 | length 637.6
  Top Layer 1 w10: J2.5 3260.01,2487.99 3346.82,2574.8 3497.24,2574.8 3521.34,2598.9 3624.03,2598.9 3738.74,2713.62 U1.37
Enable_15VDC: J2.8 U1.44 | length 462.2
  Top Layer 1 w10: J2.8 3601.85,2539.84 3680.24,2539.84 3876.04,2735.64 3876.04,2768.49 U1.44
ENABLE_M10V: J2.7 U1.41 | length 515.8
  Top Layer 1 w10: J2.7 3460.52,2498.51 3492.27,2498.51 3550.05,2556.28 3659.27,2556.28 3817.48,2714.5 U1.41
GND: C1.1 C2.1 C3.1 C4.1 C5.1 C6.1 C7.1 C8.1 C9.1 C10.1 C11.1 C12.1 C13.1 C14.1 C15.1 C16.1 C17.1 C18.1 CR1.2 CR2.2 CR3.2 CR4.2 D1.1 D2.1 D3.1 J1.16 J2.16 J3.10 J4.5 J4.SH1 J4.SH2 J4.SH3 J4.SH4 J4.SH5 J4.SH6 R4.1 S1.2 S1.4 U1.10 U1.19 U1.26 U1.49 U1.74 U1.99 U2.2 U2.7 Y1.2 Y1.4 | length 5312.9
  Top Layer 1 w10: 3413.99,3133.85 3425.2,3133.85 3426.5,3132.55 3453.93,3132.55 U1.10 ; 3416.64,2954.88 U1.19 ; 3448.2,2709.15 3451.35,2706 3522.21,2706 ; U1.26 3522.21,2706 ; U1.99 3542.39,3377.49 3542.39,3414.44 3543.31,3415.35 ; C5.1 3540.8,2687.4 3522.21,2706 ; U1.49 3974.96,2727.79 3986.22,2716.54 ; U1.74 4093.06,3289.53
  Top Layer 1 w13: v1(2460.63,3028.54) 2460.91,3028.27 2538.15,3028.27 J3.10 ; S1.4 2509.84,3306.42 2528.93,3325.51 2533.86,3325.51 2727.05,3518.7 ; S1.2 2579.61,3614.49 2673.51,3520.59 2765.83,3520.59 v1(2767.72,3518.7) 2767.72,3514.64 2763.09,3510.02 C16.1@2763.09,3464.57 ; CR4.2 2763.09,3444.75 2763.17,3444.83 2763.17,3452.37 2775.37,3464.57 C16.1 ; v1(2902.56,2799.21) 2928.15,2824.8 D2.1 ; Y1.2 3155.9,2986.61 3155.9,2993.14 3180.71,3017.95 3180.71,3023.23 Y1.4 3188.98,3033.46 3235.32,3079.81 3260.91,3079.81 v1(3263.78,3082.68) ; C17.1 3213.64,3135.69 3263.78,3085.56 v1(3263.78,3082.68) ; C18.1 3248.03,3066.93 v1(3263.78,3082.68) ; C4.1@3313.98,3201.77 3329.81,3185.94 3329.81,3174.13 v1(3332.68,3171.26) ; v1(3319.88,2872.05) 3321.98,2869.95 3348.56,2869.95 3359.98,2881.38 3371.66,2881.38 3375.98,2885.7 C12.1 ; v1(3339.57,2991.14) 3341.01,2989.7 3374.54,2989.7 C11.1 3375.98,2986.22 3380.31,2981.89 3389.63,2981.89 3416.64,2954.88 ; C9.1 3373.16,3180.18 3345.66,3180.18 3336.74,3171.26 v1(3332.68,3171.26) ; 3405.9,3139.37 3380.31,3139.37 3375.98,3143.7 3375.98,3147.27 3371.66,3151.6 3356.59,3151.6 3339.79,3168.39 3335.55,3168.39 v1(3332.68,3171.26) ; 3405.9,3141.93 3413.99,3133.85 ; 3543.31,3415.35 3548.85,3420.9 C8.1@3548.85,3454.72 ; C8.1 3550.26,3453.74 3592.52,3453.74 v1(3593.5,3452.76) 3596.37,3455.63 3596.37,3481.45 3606.56,3491.64 3606.56,3494.53 3610.06,3498.03 R4.1 ; CR2.2 4458.66,3418.19 4472.44,3431.96 4472.44,3435.21 v1(4472.44,3436.02)
  Top Layer 1 w15: v1(3412.03,2672.98) 3448.2,2709.15 ; 3986.22,2716.54 3992.74,2710.02 4020.17,2710.02 C6.1 4023.5,2673.37 ; C2.1 4019.7,2677.17 4023.5,2673.37 ; v1(4037.4,2651.57) 4037.4,2655.09 4028.48,2664.01 4028.48,2668.38 4023.5,2673.37 ; 4093.06,3289.53 4132.27,3328.73 ; 4133.62,3324.23 4132.27,3325.58 4132.27,3328.73 ; C3.1 4176.07,3329.84 4203.98,3357.75 4208.14,3357.75 v1@4208.66,3358.27 ; v1(4229.33,2704.72) 4229.33,2708.24 4210.63,2726.94 C14.1 4247.26,2821.79 4248.47,2822.99 U2.2 ; CR1.2 4304.13,3218.5 4324.62,3238.99 4324.62,3351.45 4315.84,3360.24 v1(4210.63,3360.24) v1@4208.66,3358.27 ; C13.1 4280.84,2884.74 4286.48,2879.1 4286.48,2849.94 U2.7 ; J2.16 4473.23,2487.99 4608.27,2623.03 v1(4633.86,2623.03) 4633.86,2626.55 4650.59,2643.28 4650.59,2705.71 D1.1 D3.1 ; J1.16 4472.44,3605.55 v1(4472.44,3436.02) ; 4132.27,3328.73 4132.27,3354.02 C7.1 4131.95,3358.27 v1@4208.66,3358.27
  Top Layer 1 w20: v1@4472.44,3435.21 4502.95,3404.7 4502.95,3391.73 ; J4.SH6 4559.05,3343.5 4510.83,3391.73 4502.95,3391.73 ; J4.5 4533.46,3289.37 4502.95,3319.88 4502.95,3391.73
  Top Layer 1 w25: v1(4229.33,2704.72) 4250,2725.39 C15.1 4308.18,2730.61 4308.18,2817.74 U2.7 ; CR3.2 4529.37,3031.5 ; C1.1 4529.37,3031.5 ; 4558.24,3019.69 4546.43,3031.5 4529.37,3031.5 ; J4.SH5 4559.05,3020.5 4575.79,3003.76 v1(4575.79,3002.95) 4576.36,3003.53 4576.36,3026.66 4650.1,3100.39 J4.SH1 J4.SH3 J4.SH2 ; J4.SH6 4606.3,3336.61 4623.98,3318.94 4623.98,3317.95 4664.37,3277.56 J4.SH2 ; J4.SH4 J4.SH2
GPIO_0: J3.02 U1.59 | length 2551.7
  Top Layer 1 w10: J3.02 2538.43,2614.4 2553.5,2599.32 2553.5,2599.26 2829.92,2322.83 4183.07,2322.83 4200.43,2340.2 4200.43,2640.12 4161.59,2678.96 4161.59,2958.03 4125.37,2994.25 U1.59
GPIO_1: J3.04 U1.57 | length 2457.4
  Top Layer 1 w10: J3.04 2587.28,2679.14 2587.28,2598.94 2630.61,2555.61 2639.57,2555.61 2848.25,2346.93 4095.47,2346.93 4101.32,2352.79 4101.32,2545.16 4136.68,2580.52 4136.68,2948.52 4130.83,2954.38 4062.93,2954.38 U1.57
GPIO_2: J3.06 U1.55 | length 2383.4
  Top Layer 1 w10: J3.06 2538.43,2826.59 2589.27,2775.75 2589.27,2709.01 2620.65,2677.64 2662.48,2677.64 2761.39,2578.72 2761.39,2474.14 2861.33,2374.2 3995.36,2374.2 4001.22,2380.06 4001.22,2512.45 4112.78,2624.01 4112.78,2909.99 4106.92,2915.85 4062.76,2915.85 U1.55
GPIO_3: J3.08 U1.54 | length 1889.8
  Top Layer 1 w10: v1(3631.89,2923.23) 3661.42,2952.76 3681.1,2952.76 3720.47,2992.13 3927.17,2992.13 4023.47,2895.83 U1.54
  Bottom Layer 1 w10: J3.08 2588.58,2877.84 2588.58,2804.87 2615.66,2777.79 2656.41,2777.79 2815.92,2618.28 3276.77,2618.28 3578.96,2920.47 3629.13,2920.47 v1(3631.89,2923.23)
I2C2_SCL: J2.1 R8.2 U1.46 | length 1486.9
  Top Layer 1 w10: J2.1 2862.65,2487.99 2919.57,2544.91 2994.54,2544.91 3000.4,2539.06 3000.4,2453.86 3042.42,2411.83 3797.02,2411.83 3802.88,2417.69 3802.88,2515.31 3828.74,2541.17 R8.2 3854.03,2643.4 3854.03,2686.75 3893.65,2726.38 3901.92,2726.38 3915.41,2739.87 3915.41,2768.49 U1.46
I2C2_SDA: J2.2 R7.2 U1.47 | length 1411.9
  Top Layer 1 w10: J2.2 2950,2446.08 3002.38,2393.7 3886.1,2393.7 3901.18,2408.77 3901.18,2530.11 3881.32,2549.96 R7.2 3881.32,2680.54 3935.09,2734.3 3935.09,2768.49 U1.47
LED_1: R3.2 U1.43 | length 911.4
  Top Layer 1 w10: U1.43 3856.85,2808.13 v1(3907.31,2858.59) ; R3.2 4460.69,2665.3 v1(4498.03,2627.95)
  Bottom Layer 1 w10: v1(3907.31,2858.59) 3962.93,2858.59 4218.18,2603.35 4464.35,2603.35 4485.52,2624.51 4494.59,2624.51 v1(4498.03,2627.95)
LED_2: R5.2 U1.24 | length 312.5
  Top Layer 1 w10: R5.2 3162.48,2828.6 3388.48,2828.6 3416.34,2856.46 U1.24
LED_3: R6.2 U1.61 | length 600
  Top Layer 1 w10: U1.61 4180.94,3033.62 v1(4212.6,3001.97) ; R6.2 4460.69,2826.83 v1(4498.03,2864.17)
  Bottom Layer 1 w10: v1(4212.6,3001.97) 4360.24,3001.97 v1(4498.03,2864.17)
NetC14_2: C14.2 R1.1 U2.1 | length 197
  Top Layer 1 w15: C14.2 4241.48,2853.41 U2.1@4248.47,2860.39 ; R1.1@4290.72,2967.89 4289.19,2966.36 4267.54,2966.36 4245.08,2943.9 4245.08,2871.66 4248.09,2868.64 4248.09,2860.77 U2.1@4248.47,2860.39 ; U2.1@4248.47,2860.39 U2.1 U2.1@4248.47,2860.39
NetD1_2: D1.2 R3.1 | length 67
  Top Layer 1 w10: R3.1 D1.2
NetD2_2: D2.2 R5.1 | length 56.9
  Top Layer 1 w10: D2.2 3047.87,2822.2 R5.1
NetD3_2: D3.2 R6.1 | length 67
  Top Layer 1 w10: R6.1 D3.2
NRST: C16.2 CR4.1 J3.09 S1.1 S1.3 U1.14 | length 1851.1
  Top Layer 1 w10: J3.09 2638.43,3022.18 2714.74,2945.87 2815.3,2945.87 ; S1.3 2687.01,3296.57 2707.6,3275.98 2730.75,3275.98 2788.23,3218.5 ; S1.1 2743.78,3614.49 2833.77,3524.5 C16.2 ; CR4.1 2803.31,3405.51 2833.61,3435.82 C16.2@2833.61,3464.57 ; CR4.1@2788.23,3405.38 2788.23,3218.5 ; U1.14 3453.93,3052.81 3423.08,3052.81 3400.49,3030.22 3325.93,3030.22 3303.25,3007.54 3303.25,2985.11 3264.01,2945.87 2819.86,2945.87 2815.3,2945.87 ; 2788.23,3218.5 2788.23,2972.94 2815.3,2945.87
OSC_IN: C17.2 U1.12 Y1.1 | length 519.2
  Top Layer 1 w10: Y1.1 3152.03,3035.89 3152.03,3136.35 C17.2 3165.27,3149.59 3165.27,3161.84 3190.45,3187.01 3248.03,3187.01 3281.18,3153.85 3281.18,3129.92 3298.44,3112.67 3298.44,3083.99 3304.3,3078.13 3393.09,3078.13 3407.64,3092.68 U1.12
OSC_OUT: C18.2 U1.13 Y1.3 | length 320.5
  Top Layer 1 w10: Y1.3 3192.31,2981.69 3246.51,2981.69 3250.3,2985.47 3278.2,2985.47 3284.06,2991.33 3284.06,3018.31 3326.77,3061.02 3405.51,3061.02 3416.98,3072.49 3453.93,3072.49 U1.13
USB_FS_CN_N: CR1.4 J4.2 | length 198.7
  Top Layer 1 w15: CR1.4 4382.87,3181.1 4407.77,3206 4475.86,3206 4482.75,3212.89 4559.74,3212.89 J4.2
USB_FS_CN_P: CR1.6 J4.3 | length 199.2
  Top Layer 1 w15: CR1.6 4382.87,3255.91 4398.2,3240.57 4398.2,3239.79 4406.99,3231 4465.51,3231 4472.4,3237.89 4559.74,3237.89 J4.3
USB_FS_ID: CR2.1 J4.4 U1.69 | length 669.2
  Top Layer 1 w10: U1.69 4112.05,3191.1 4124.02,3179.13 4173.23,3179.13 v1(4212.6,3139.76) ; v1(4379.92,3336.61) 4412.11,3304.43 CR2.1 ; CR2.1@4463.66,3304.43 4504.31,3263.78 J4.4
  Bottom Layer 1 w10: v1(4212.6,3139.76) 4257.56,3139.76 4379.92,3262.13 v1(4379.92,3336.61)
USB_FS_N: CR1.3 U1.70 | length 217
  Top Layer 1 w10: U1.70 4210.68,3210.79 4240.37,3181.1
  Top Layer 1 w15: 4240.37,3181.1 CR1.3
USB_FS_P: CR1.1 U1.71 | length 215.2
  Top Layer 1 w10: U1.71 4214.93,3230.47 4240.37,3255.91
  Top Layer 1 w15: 4240.37,3255.91 CR1.1
USB_FS_VBUS: R2.2 U1.68 | length 201.6
  Top Layer 1 w12: U1.68 4100.01,3171.42 4111.98,3159.45 4129.29,3159.45
  Top Layer 1 w13: 4129.29,3159.45 4139.13,3149.61 4143.7,3149.61
  Top Layer 1 w20: 4143.7,3149.61 4143.7,3129.22 4202.06,3070.87 R2.2
VCAP1: C2.2 U1.48 | length 104.7
  Top Layer 1 w10: 3955.23,2727.63 U1.48@3955.23,2768.95
  Top Layer 1 w13: 3929.51,2701.91 3955.23,2727.63
  Top Layer 1 w15: C2.2 3929.51,2682.57 3929.51,2701.91
VCAP2: C3.2 U1.73 | length 113
  Top Layer 1 w13: U1.73 4063.43,3268.84 4169.04,3268.84 C3.2
pads on no net: CR1.5 J2.9 J2.10 J2.11 J2.12 J2.13 J2.14 J2.15 J3.12 U1.1 U1.2 U1.7 U1.8 U1.9 U1.15 U1.16 U1.17 U1.18 U1.22 U1.23 U1.25 U1.29 U1.31 U1.32 U1.34 U1.36 U1.38 U1.40 U1.42 U1.45 U1.51 U1.53 U1.56 U1.58 U1.60 U1.62 U1.65 U1.67 U1.77 U1.79 U1.81 U1.82 U1.85 U1.86 U1.88 U1.90 U1.91 U1.92 U1.95 U1.96 U1.97 U1.98 U2.3

## Polygon pours and split planes (outlines as drawn)
GND on GND (split plane): 4679.1,3926.47 4683.68,3925.38 4688.03,3923.57 4692.04,3921.11 4695.62,3918.06 4698.67,3914.48 4701.13,3910.47 4702.93,3906.12 4704.03,3901.54 4704.36,3897.35 4704.31,3896.85 4704.31,2323.62 4704.36,2323.12 4704.03,2318.93 4702.93,2314.35 4701.13,2310.01 4698.67,2305.99 4695.62,2302.41 4692.04,2299.36 4688.03,2296.9 4683.68,2295.1 4679.1,2294 4674.91,2293.67 4674.41,2293.72 2412.2,2293.72 2411.7,2293.67 2407.51,2294 2402.94,2295.1 2398.59,2296.9 2394.58,2299.36 2391,2302.41 2387.94,2305.99 2385.48,2310.01 2383.68,2314.35 2382.58,2318.93 2382.25,2323.12 2382.3,2323.62 2382.3,3896.85 2382.25,3897.35 2382.58,3901.54 2383.68,3906.12 2385.48,3910.47 2387.94,3914.48 2391,3918.06 2394.58,3921.11 2398.59,3923.57 2402.94,3925.37 2407.51,3926.47 2411.7,3926.8 2412.2,3926.75 2412.21,3926.75 4674.41,3926.75 4674.91,3926.8
3V3 on 3V3 (split plane): 4679.1,3926.47 4683.68,3925.38 4688.03,3923.57 4692.04,3921.11 4695.62,3918.06 4698.67,3914.48 4701.13,3910.47 4702.93,3906.12 4704.03,3901.54 4704.36,3897.35 4704.31,3896.85 4704.31,2323.62 4704.36,2323.12 4704.03,2318.93 4702.93,2314.35 4701.13,2310.01 4698.67,2305.99 4695.62,2302.41 4692.04,2299.36 4688.03,2296.9 4683.68,2295.1 4679.1,2294 4674.91,2293.67 4674.41,2293.72 2412.2,2293.72 2411.7,2293.67 2407.51,2294 2402.94,2295.1 2398.59,2296.9 2394.58,2299.36 2391,2302.41 2387.94,2305.99 2385.48,2310.01 2383.68,2314.35 2382.58,2318.93 2382.25,2323.12 2382.3,2323.62 2382.3,3896.85 2382.25,3897.35 2382.58,3901.54 2383.68,3906.12 2385.48,3910.47 2387.94,3914.48 2391,3918.06 2394.58,3921.11 2398.59,3923.57 2402.94,3925.37 2407.51,3926.47 2411.7,3926.8 2412.2,3926.75 2412.21,3926.75 4674.41,3926.75 4674.91,3926.8

## Silkscreen, mask and mechanical layers (free items; w line width, h text height)
Mechanical 13:
  lines w10: 2362.2,2323.62 ccw(c2412.2,2323.62) 2412.2,2273.62 4674.41,2273.62 ccw(c4674.41,2323.62) 4724.41,2323.62 4724.41,3896.85 ccw(c4674.41,3896.85) 4674.41,3946.85 2460.63,3946.85 2412.21,3946.85 ccw(c2412.2,3896.85) 2362.2,3896.85 2362.21,2323.62

## Text inside footprints (layer, text, board x,y; h text height)
CR1: Mechanical 13 "*" at 4288.87,3225.5 h50
J4: Mechanical 13 "PCB EDGE" at 4714.57,3405.51 h32 r90
U2: Mechanical 13 "*" at 4259.59,2854.09 h50